# Altium PCB PCB1.PcbDoc
Units mil, origin at the board's own origin, x right, y up, seen from the top; angles counter-clockwise.
Board outline 6010.03 x 4010.03 mil, 2 copper layers (Top Layer, Bottom Layer); 63 components, 52 nets, 252 pads, 32 vias.
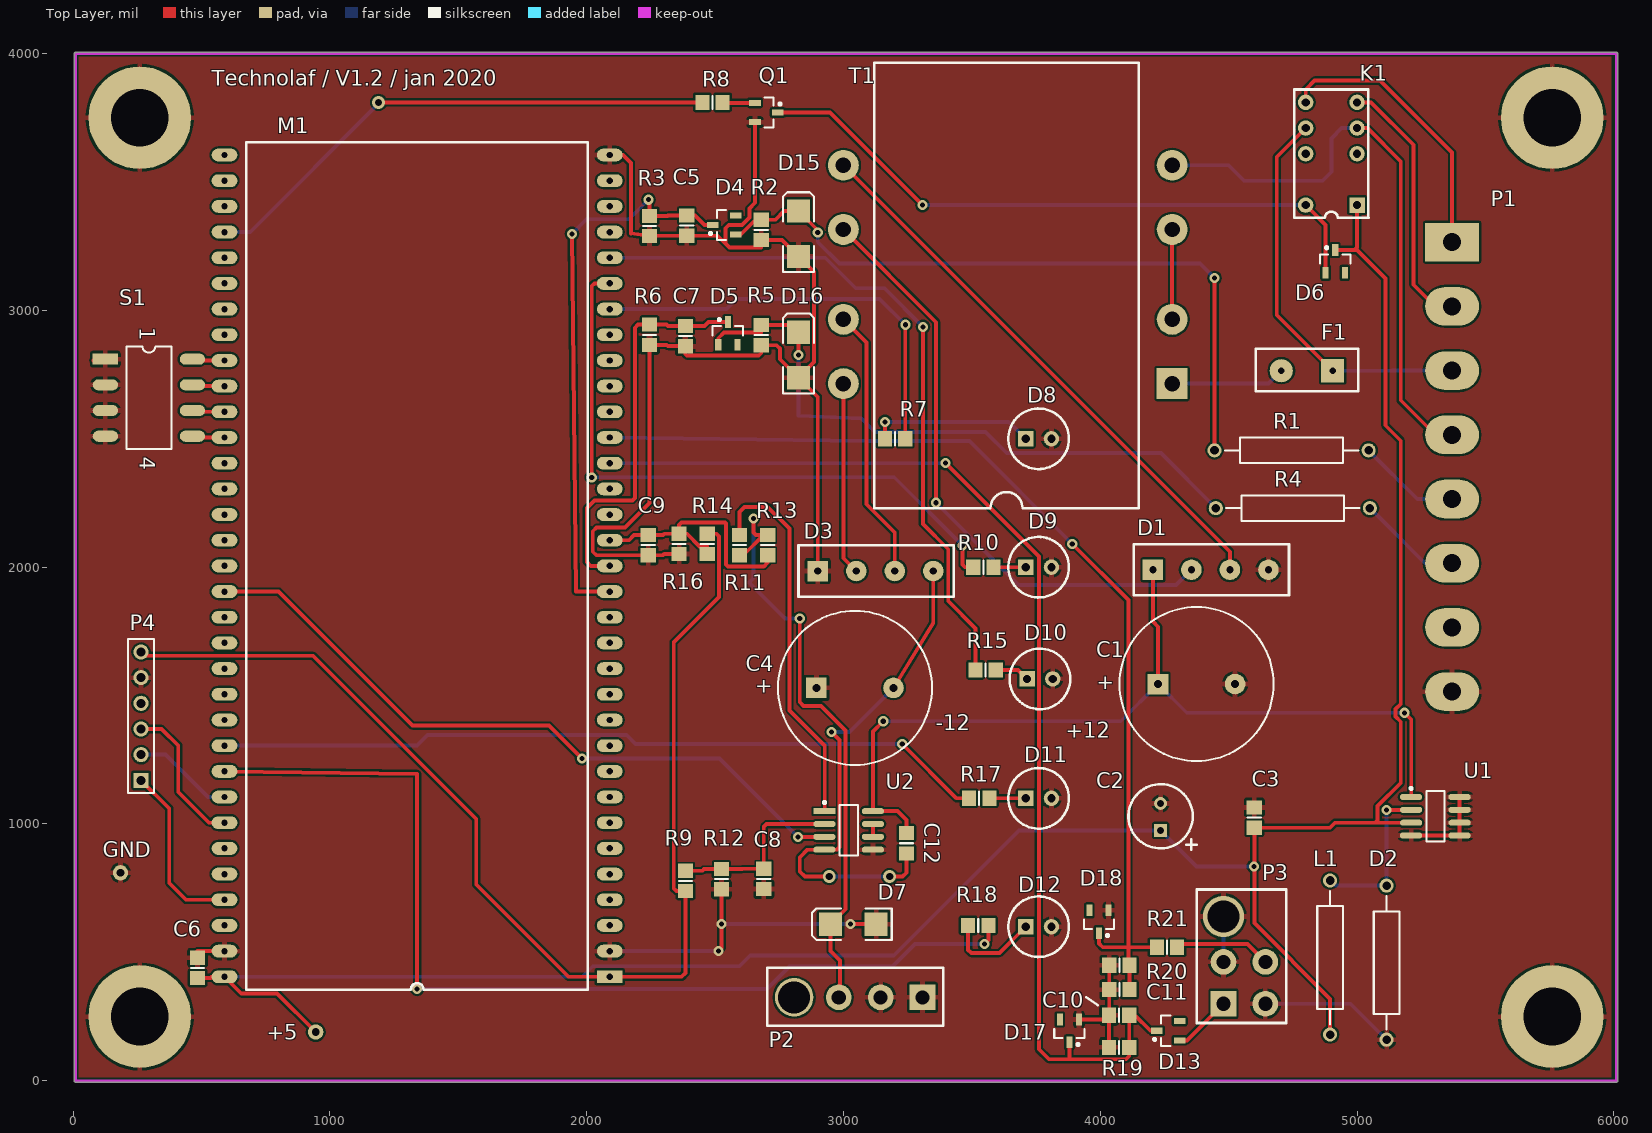
[diagram p0: Top Layer view]
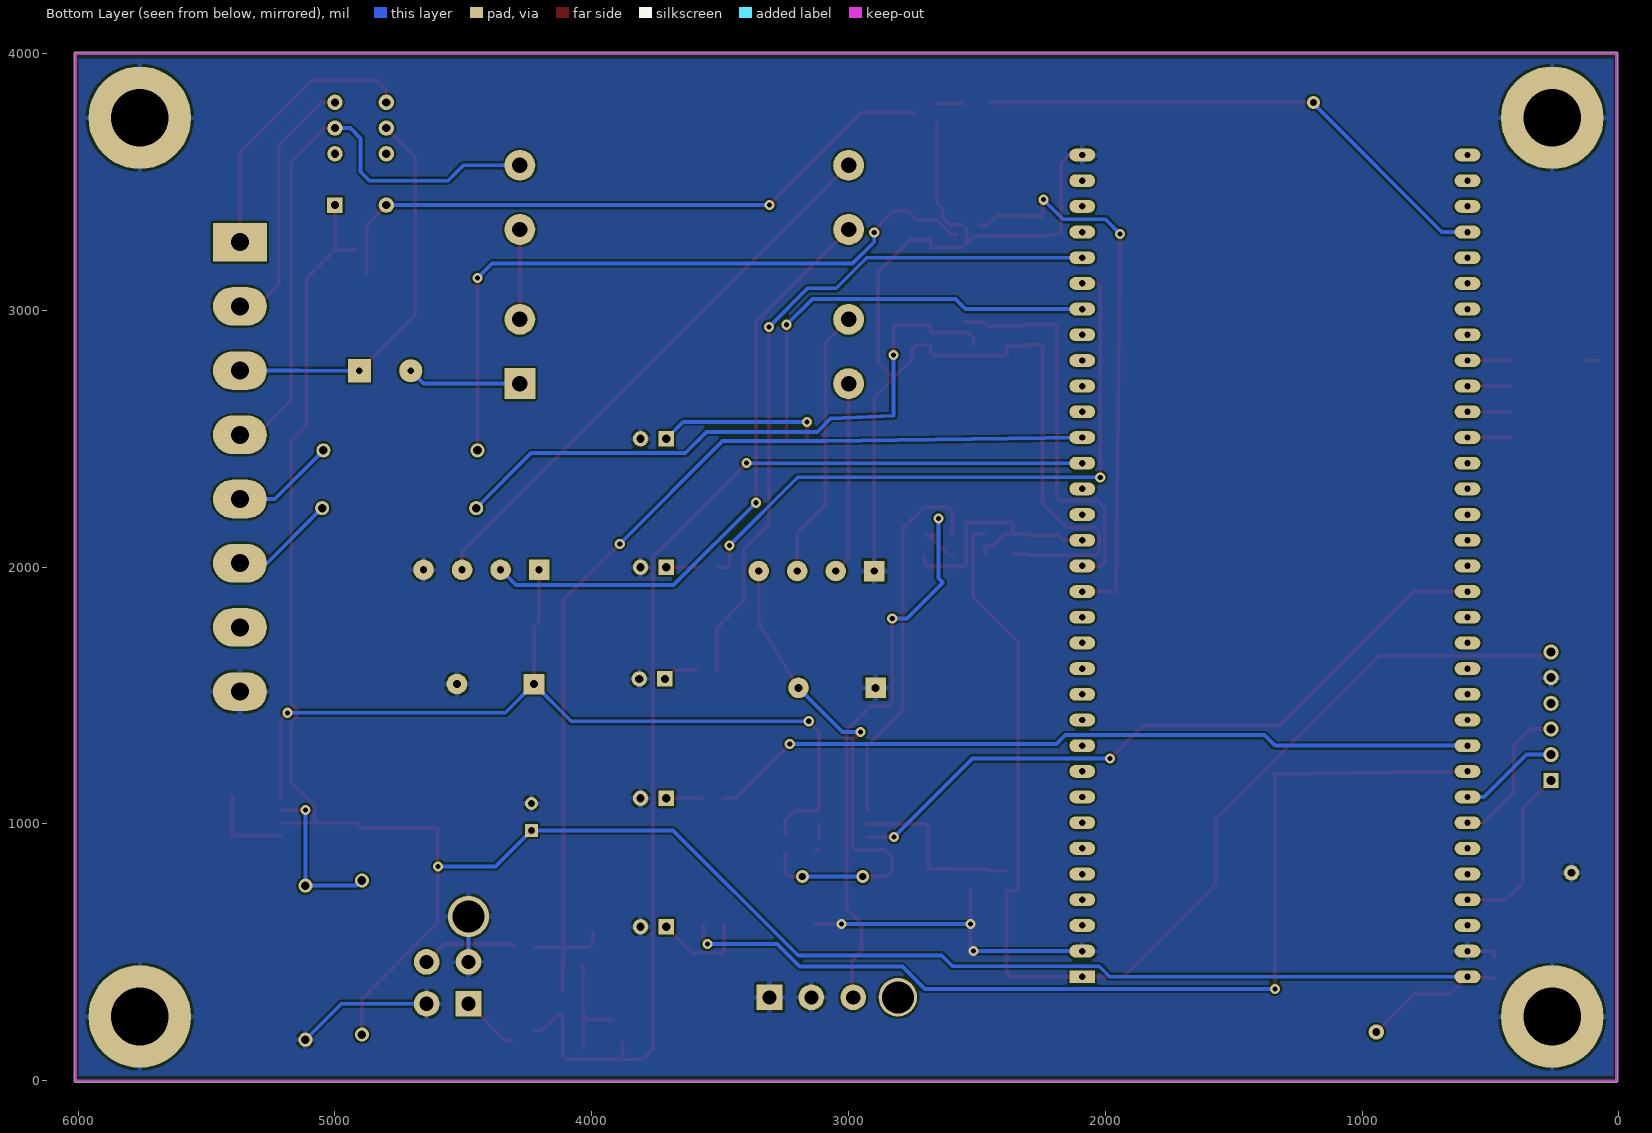
[diagram p1: Bottom Layer view, seen from below]

## Layer stack, top to bottom
Top Solder: solder mask 0.4, Solder Resist, Dk 3.5
Top Layer: signal copper 1.4
Dielectric 1: dielectric 12.6, FR-4, Dk 4.8
Bottom Layer: signal copper 1.4
Bottom Solder: solder mask 0.4, Solder Resist, Dk 3.5

## Board outline
4.98,0 4.98,4000 cw(c10,4000) 10,4005.02 6010,4005.02 cw(c6010,4000) 6015.02,4000 6015.02,0 cw(c6010,0) 6010,-5.01 10,-5.01 cw(c10,0)

## Design rules (kind name [scope] priority, off if disabled: settings)
BoardOutlineClearance [All] p1: gap=7.87 ignorepadtopadclearanceinfootprint=FALSE except(15.75: Arc-SplitBarrior Arc-SplitContinuation Track-SplitBarrior Track-SplitContinuation SMDPad-SplitBarrior SMDPad-SplitContinuation THPad-SplitBarrior THPad-SplitContinuation Via-SplitBarrior Via-SplitContinuation Fill-SplitBarrior Fill-SplitContinuation Poly-SplitBarrior Poly-SplitContinuation Region-SplitBarrior Region-SplitContinuation Text-SplitBarrior Text-SplitContinuation)
Clearance "Clearance HV" [InNetClass('hv')] p1: gap=30 ignorepadtopadclearanceinfootprint=TRUE
Clearance "Clearance Bottom Layer" [OnLayer('Bottom Layer')] p2: gap=8 ignorepadtopadclearanceinfootprint=TRUE except(10: Arc-Text Track-Text SMDPad-Text THPad-Text Via-Text Fill-Text Poly-Text Region-Text Text-Text)
Clearance "Clearance Top Layer" [OnLayer('Top Layer')] p3: gap=8 ignorepadtopadclearanceinfootprint=TRUE except(10: Arc-Text Track-Text SMDPad-Text THPad-Text Via-Text Fill-Text Poly-Text Region-Text Text-Text)
Clearance "Clearance Top Layer_1" [OnLayer('Top Layer')] p4: gap=8 ignorepadtopadclearanceinfootprint=TRUE except(10: Arc-Text Track-Text SMDPad-Text THPad-Text Via-Text Fill-Text Poly-Text Region-Text Text-Text)
HoleSize [All] p1: absolutevalues=TRUE maxlimit=248.03 minlimit=7.87 maxpercent=80.000 minpercent=20.000
MinimumAnnularRing [All] p1: minimumring=3
MinimumSolderMaskSliver [All] p1: minsoldermaskwidth=3.94
PolygonConnect PolygonConnect_1 [All] p1: thpad.connectstyle=Relief thpad.reliefconductorwidth=20 thpad.reliefentries=4 thpad.polygonreliefangle="90 Angle" thpad.airgapwidth=10 smdpad.connectstyle=Relief smdpad.reliefconductorwidth=20 smdpad.reliefentries=4 smdpad.polygonreliefangle="90 Angle" smdpad.airgapwidth=10 via.connectstyle=Direct via.reliefconductorwidth=20 via.reliefentries=4 via.polygonreliefangle="90 Angle" via.airgapwidth=10
RoomDefinition Top [InComponentClass('Top')] p1: confinementstyle=ConfineIn formatcopy=TRUE lockcomponents=FALSE outline 10,0 6000,0 6010,10 6010,4000 10,4000
RoutingCorners [All] p1: cornerstyle=Round minsetback=100 maxsetback=100
RoutingVias [All] p1: holewidth=19.68 width=39.37 viastyle="Through Hole" minholewidth=7.87 minwidth=17.72 maxholewidth=39.37 maxwidth=78.74
SilkToSilkClearance [All] p1: silktosilkclearance=3.94
SilkToSolderMaskClearance [IsPad] p1: minsilkscreentomaskgap=3.94 clearancetoexposedcopper=TRUE
SolderMaskExpansion [All] p1: expansion=4
Width [All] p1: maxlimit=100 minlimit=3.5 preferedwidth=15
25 further rules are at their usual default settings.

## Components (designator, comment, footprint, x,y, rotation, side; value= is the part's Value field where it differs from the comment)
C1 "Cap Pol1" RB7.6-15#1 4375,1545 r180 top value=2200u
C2 "Cap Pol1" RB0.1 4235,980 r90 top value=100uF
C3 "Cap" 6-0805_M 4600,1025 r270 top value=100n
C4 "2200u" RB7.6-15#2 3045,1530 r180 top
C5 "Cap" 6-0805_M 2390,3330 r90 top value=100n
C6 "Cap" 6-0805_M 485,440 r270 top value=100nF
C7 "Cap" 6-0805_M 2385,2900 r90 top value=100n
C8 "Cap" 6-0805_M 2690,786.22 r90 top value=100n
C9 "Cap" 6-0805_M 2240,2085.63 r90 top value=10nF
C10 "Cap" 6-0805_M 4073.78,255 r0 top value=100n
C11 "Cap" 6-0805_M 4074.37,355 r0 top value=100n
C12 "Cap" 6-0805_M 3245,925 r90 top value=100n
D1 "Bridge1" KBP06M 4205,1990 r90 top
D2 "BAT48" AXIAL-0.6 5115,460 r90 top
D3 "Bridge1" KBP06M 2900,1985 r90 top
D4 "MMBD914LT1G" SOT23_914 2535.71,3332.4 r180 top
D5 "MMBD914LT1G" SOT23_914 2550,2910.71 r90 top
D6 "MMBD914" SOT23_914 4915,3190.71 r90 top
D7 "SMBJ5.0CA" SMB 3038.58,610 r180 top
D8 "IN-S63AT5B" LED_T13/4 3760,2500 r90 top
D9 "" LED_T13/4 3760,2000 r90 top
D10 "" LED_T13/4 3765,1565 r90 top
D11 "" LED_T13/4 3760,1100 r90 top
D12 "" LED_T13/4 3760,600 r90 top
D13 "MMBD914" SOT23_914 4265,195 r180 top
D15 "SMBJ5.0CA" SMB 2825,3298.58 r90 top
D16 "SMBJ5.0CA" SMB 2825,2826.42 r90 top
D17 "MMBZ5V6ALT3G" SOT23_914 3880,194.29 r270 top
D18 "MMBZ5V6ALT3G" SOT23_914 3995,619.29 r270 top
F1 "MF-RM025/240" MF-RM025/240 4905,2765 r270 top
K1 "EC2-5NU" EC2-5NU 5000,3410 r180 top
L1 "B78108E1683J009" AXIAL-0.6 4895,480 r270 top value=68uH
M1 "STM32F0DISCOVERY" STM32F0DISCO 2090,405 r180 top
P1 "641828-1" 641828-1 5370,3265.51 r0 top
P2 "1-770873-0" MATENLOK_1X3 3308,325 r270 top
P3 "1-770874-1" MATENLOK_2X2 4480,300 r90 top
P4 "WIFI" HDR1X6 265,1170 r90 top
Q1 "DMN65D8L-7" SOT23_914 2700,3770.51 r0 top
R1 "RNV14FAL1M00" AXIAL-0.6 4745,2455 r0 top value=1M
R2 "Res1" 6-0805_M 2680,3313.78 r90 top value=10K
R3 "Res1" 6-0805_M 2245,3328.78 r90 top value=1M
R4 "RNV14FAL1M00" AXIAL-0.6 4750,2230 r0 top value=1M
R5 "Res1" 6-0805_M 2680,2903.78 r90 top value=10K
R6 "Res1" 6-0805_M 2245,2905 r90 top value=1M
R7 "Res1" 6-0805_M 3201.22,2500 r180 top value=68R
R8 "Res1" 6-0805_M 2490,3810 r180 top value=68R
R9 "Res1" 6-0805_M 2385,778.78 r270 top value=1K
R10 "Res1" 6-0805_M 3545,2000 r0 top value=68R
R11 "Res1" 6-0805_M 2595,2085.63 r90 top value=510R
R12 "Res1" 6-0805_M 2525,785 r90 top value=1K
R13 "Res1" 6-0805_M 2705,2085.63 r90 top value=200K
R14 "Res1" 6-0805_M 2470,2090.63 r90 top value=51K
R15 "Res1" 6-0805_M 3553.78,1600 r0 top value=68R
R16 "Res1" 6-0805_M 2360,2090.63 r90 top value=51K
R17 "Res1" 6-0805_M 3528.78,1100 r0 top value=68R
R18 "Res1" 6-0805_M 3525,605 r180 top value=68R
R19 "Res1" 6-0805_M 4073.78,130 r0 top value=300R
R20 "Res1" 6-0805_M 4074.37,450 r0 top value=100K
R21 "Res1" 6-0805_M 4260,520 r180 top value=300R
S1 "219-4MSTR" DIPSW4 126.02,2810 r0 top
T1 "FS16-400-C2" FS16-400-C2 4280,2715 r180 top
U1 "AP1509-50" SO8_N#1 5305,1030 r0 top
U2 "LF353" SO8_N#2 3020.51,975 r0 top

## Footprints (in the part's own frame and the unit in brackets; to place one, negate y for a bottom-side part, rotate by r counter-clockwise, add the part's x,y. Pads: shape width x height; smd on the part's side, far side on the other; paste and mask are expansions set on the pad)
6-0805_M [mm] "Chip Resistor, Body 2.0x1.2mm, IPC Low Density"
  rect 1.4x1.5 smd: 1(-1,0) 2(1,0)
  silkscreen extent 0,-0.65 0,0.65, body extent -1.07,-0.7 1.07,0.7, height 0.7
641828-1 [mil] "TE MATENLOK"
  rect 210x150 hole 70: 1(0,0)
  oval 210x150 hole 70: 2(0,-250) 3(0,-500) 4(0,-750) 5(0,-1000) 6(0,-1250) 7(0,-1500) 8(0,-1750)
AXIAL-0.6 [mm] "Axial Device, Thru-Hole; 2 Leads; 0.6 in Pin Spacing"
  round 1.4 hole 0.85: 1(-7.62,0) 2(7.62,0)
  silkscreen extent -6.6,-1.27 6.6,1.27
DIPSW4 [mm]
  rect 2.5x1.1 smd: 1(0,0)
  oval 2.5x1.1 smd: 2(0,-2.54) 3(0,-5.08) 4(0,-7.62) 5(8.61,-7.62) 6(8.61,-5.08) 7(8.61,-2.54) 8(8.61,0)
  silkscreen extent 2.08,-8.89 6.53,1.27
EC2-5NU [mil]
  rect 60x60 hole 32: 1(0,0)
  round 60 hole 32: 3(0,-200) 4(0,-300) 5(0,-400) 8(200,-400) 9(200,-300) 10(200,-200) 12(200,0)
  silkscreen extent -45,-450 245,50
FS16-400-C2 [mil]
  rect 120x120 hole 60: 1(0,0)
  round 120 hole 60: 2(0,-250) 3(0,-600) 4(0,-850) 5(1280,-850) 6(1280,-600) 7(1280,-250) 8(1280,0)
  silkscreen extent 130,-1250 1160,485
HDR1X6 [mm] "Connector; Header; 6 Position"
  rect 1.5x1.5 hole 0.9: 1(0,0)
  round 1.5 hole 0.9: 2(2.54,0) 3(5.08,0) 4(7.62,0) 5(10.16,0) 6(12.7,0)
  silkscreen extent -1.27,-1.27 13.97,1.27
KBP06M [mil]
  rect 80x80 hole 28: 1(0,0)
  round 80 hole 28: 2(0,-150) 3(0,-450) 4(0,-300)
  silkscreen extent -100,-530 100,75
LED_T13/4 [mil]
  rect 60x60 hole 32: 1(0,50)
  round 60 hole 32: 2(0,-50)
  silkscreen extent -118,-118 118,118
MATENLOK_1X3 [mil]
  rect 100x100 hole 55: 1(0,0)
  round 100 hole 55: 2(0,-163) 3(0,-326)
  round 150 hole 125: 4(0,-500)
  silkscreen extent -115,-605 110,82
MATENLOK_2X2 [mil]
  rect 100x100 hole 55: 1(0,0)
  round 100 hole 55: 2(0,-163) 3(163,-163) 4(163,0)
  round 160 hole 125: 2(340,0)
  silkscreen extent -75,-244 445,105
MF-RM025/240 [mil]
  rect 90x90 hole 26: 1(0,0)
  round 90 hole 26: 2(0,-200)
  silkscreen extent -85,-300 80,100
RB0.1 [mil]
  rect 50x50 hole 28: 1(-5,0)
  round 50 hole 28: 2(100,0)
  silkscreen extent -80,-140 175,125
RB7.6-15#1 [mil] "Polarized Capacitor (Radial); 2 Leads"
  rect 80x80 hole 32: 1(150,0)
  round 80 hole 32: 2(-150,0)
  silkscreen extent -300,-300 300,300
RB7.6-15#2 [mil] "Polarized Capacitor (Radial); 2 Leads"
  rect 80x80 hole 31: 1(150,0)
  round 80 hole 31: 2(-150,0)
  silkscreen extent -300,-300 300,300
SMB [mm] "DO-214-AA/SMB; 2 C-Bend Leads; Body 5.3 x 3.6 mm, inc. leads (LxW)"
  rect 2.3x2.3 smd: 1(-2.25,0) 2(2.25,0)
  silkscreen extent -3.8,-1.55 4.1,1.55
SO8_N#1 [mm] "SOIC, 8-Leads, Body 4.9x3.9mm, Pitch 1.27mm, IPC Medium Density"
  oval 2.2x0.6 smd: 1(-2.4,1.905) 2(-2.4,0.635) 3(-2.4,-0.635) 4(-2.4,-1.905) 5(2.4,-1.905) 6(2.4,-0.635) 7(2.4,0.635) 8(2.4,1.905)
  silkscreen extent -2.52,-2.5 0.9,2.88, body extent -2,-2.5 2,2.5, height 1.75
SO8_N#2 [mm] "SOIC, 8-Leads, Body 4.9x3.9mm, Pitch 1.27mm, IPC Medium Density"
  rect 2.2x0.6 smd: 1(-2.4,1.905)
  oval 2.2x0.6 smd: 2(-2.4,0.635) 3(-2.4,-0.635) 4(-2.4,-1.905) 5(2.4,-1.905) 6(2.4,-0.635) 7(2.4,0.635) 8(2.4,1.905)
  silkscreen extent -2.52,-2.5 0.9,2.88, body extent -2,-2.5 2,2.5, height 1.75
SOT23_914 [mm] "SOT23, 3-Leads, Body 2.9x1.3mm, Pitch 0.95mm, Lead Span 2.3mm - Reverse Pinning, IPC Medium Density"
  rect 1.15x0.6 smd: 1(-1.125,0.95) 2(1.125,0) 3(-1.125,-0.95)
  silkscreen extent -0.2,-1.5 1.47,1.5, body extent -0.7,-1.5 0.7,1.5, height 1.1
STM32F0DISCO [mil]
  rect 100x50 hole 25: 1(0,0)
  oval 100x50 hole 25: 2(0,-100) 3(0,-200) 4(0,-300) 5(0,-400) 6(0,-500) 7(0,-600) 8(0,-700) 9(0,-800) 10(0,-900) 11(0,-1000) 12(0,-1100) 13(0,-1200) 14(0,-1300) 15(0,-1400) 16(0,-1500) 17(0,-1600) 18(0,-1700) 19(0,-1800) 20(0,-1900) 21(0,-2000) 22(0,-2100) 23(0,-2200) 24(0,-2300) 25(0,-2400) 26(0,-2500) 27(0,-2600) 28(0,-2700) 29(0,-2800) 30(0,-2900) 31(0,-3000) 32(0,-3100) 33(0,-3200) 34(1500,-3200) 35(1500,-3100) 36(1500,-3000) 37(1500,-2900) 38(1500,-2800) 39(1500,-2700) 40(1500,-2600) 41(1500,-2500) 42(1500,-2400) 43(1500,-2300) 44(1500,-2200) 45(1500,-2100) 46(1500,-2000) 47(1500,-1900) 48(1500,-1800) 49(1500,-1700) 50(1500,-1600) 51(1500,-1500) 52(1500,-1400) 53(1500,-1300) 54(1500,-1200) 55(1500,-1100) 56(1500,-1000) 57(1500,-900) 58(1500,-800) 59(1500,-700) 60(1500,-600) 61(1500,-500) 62(1500,-400) 63(1500,-300) 64(1500,-200) 65(1500,-100) 66(1500,0)
  silkscreen extent 85,-3250 1415,50

## Part data
C1 C2: "Polarized Capacitor (Radial)", LatestRevisionDate=17-Jul-2002, LatestRevisionNote="Re-released for DXP Platform.", PackageDescription="Polarized Capacitor (Radial); 2 Leads", PackageReference=RB7.6-15, Published=8-Jun-2000, Publisher="Altium Limited"
C3 C5 C6 C7 C8 C9 C10 C11 C12: "Capacitor", LatestRevisionDate=17-Jul-2002, LatestRevisionNote="Re-released for DXP Platform.", PackageDescription="Radial Cap, Thru-Hole; 2 Leads; 0.3 in Pin Spacing", PackageReference=RAD-0.3, Published=8-Jun-2000, Publisher="Altium Limited"
C4: library part "Cap Pol1", "Polarized Capacitor (Radial)", LatestRevisionDate=17-Jul-2002, LatestRevisionNote="Re-released for DXP Platform.", PackageDescription="Polarized Capacitor (Radial); 2 Leads", PackageReference=RB7.6-15, Published=8-Jun-2000, Publisher="Altium Limited"
D1 D3: "Full Wave Diode Bridge", DatasheetVersion=E2732B, LatestRevisionDate=29-May-2009, LatestRevisionNote="Sch pins A & K swapped.", PackageDescription="Bridge Rectifier; 4 Terminals; Body 9.4 x 9.4 mm (typ); Pitch 5.08 mm", PackageReference=D-38, Published=8-Jun-2000, Publisher="Altium Limited"
D2: library part "D Schottky", "Schottky Diode", Code_JEDEC=DO-214-AA, LatestRevisionDate=17-Jul-2002, LatestRevisionNote="Re-released for DXP Platform.", PackageDescription="DO-214-AA/SMB; 2 C-Bend Leads; Body 5.3 x 3.6 mm, inc. leads (LxW)", PackageReference=SMB, Published=8-Jun-2000, Publisher="Altium Limited"
D4 D5 D6 D7 D13: library part Diode, "Default Diode", Code_JEDEC=DO-214-AB, LatestRevisionDate=17-Jul-2002, LatestRevisionNote="Re-released for DXP Platform.", PackageDescription="DO-214-AB/SMC; 2 C-Bend Leads; Body 7.9 x 5.9 mm, inc. leads (LxW)", PackageReference=SMC, PackageVersion=Sep-1996, Published=8-Jun-2000, Publisher="Altium Limited"
D8 D9 D10 D11 D12: library part LED0, "Typical INFRARED GaAs LED", LatestRevisionDate=08-Jul-2005, LatestRevisionNote="Mech Layer 1 removed.", PackageDescription="LED; 2 Leads", PackageReference=LED-0, Published=8-Jun-2000, Publisher="Altium Limited"
D15 D16 D17 D18: library part "D Zener", "Zener Diode", LatestRevisionDate=17-Jul-2002, LatestRevisionNote="Re-released for DXP Platform.", PackageDescription="Diode, Thru-Hole; 2 Leads; 0.7 in Pin Spacing", PackageReference=DIODE-0.7, Published=8-Jun-2000, Publisher="Altium Limited"
F1: library part "Fuse 2", "MF-RM025/240-2", LatestRevisionDate=17-Jul-2002, LatestRevisionNote="Re-released for DXP Platform.", PackageDescription="Thru-Hole; 2 Leads", PackageReference=PIN-W2/E2.8, Published=8-Jun-2000, Publisher="Altium Limited"
K1: library part Relay-DPDT, "Dual-Pole Dual-Throw Relay", LatestRevisionDate=17-Jul-2002, LatestRevisionNote="Re-released for DXP Platform.", PackageDescription="Relay; 8 Leads", PackageReference=DIP-P8, Published=24-Mar-1999, Publisher="Altium Limited"
L1: library part Inductor, "Inductor", Code_IEC=1005, Code_JEITA=0402, LatestRevisionDate=29-May-2009, LatestRevisionNote="IPC-7351 Footprint Added.", PackageDescription="Chip Inductor", PackageReference=0402-A, Published=8-Jun-2000, Publisher="Altium Limited"
P1: library part "Header 8", "Header, 8-Pin", LatestRevisionDate=17-Jul-2002, LatestRevisionNote="Re-released for DXP Platform.", Publisher="Altium Limited"
P2: library part "Header 3", "Header, 3-Pin", LatestRevisionDate=17-Jul-2002, LatestRevisionNote="Re-released for DXP Platform.", Publisher="Altium Limited"
P3: library part "Header 4", "Header, 4-Pin", LatestRevisionDate=17-Jul-2002, LatestRevisionNote="Re-released for DXP Platform.", Publisher="Altium Limited"
P4: library part "Header 6", "Header, 6-Pin", LatestRevisionDate=17-Jul-2002, LatestRevisionNote="Re-released for DXP Platform.", Publisher="Altium Limited"
Q1: library part MOSFET-N, "N-Channel MOSFET", LatestRevisionDate=17-Jul-2002, LatestRevisionNote="Re-released for DXP Platform.", PackageDescription="TO, Flat Index; 3 In-Line, Axial Leads; Body Dia. 4.6mm; Lead Dia. 0.5 mm (max)", PackageReference=E3, PackageVersion=1995/1996, Published=8-Jun-2000, Publisher="Altium Limited"
R1 R4: library part Res1, "Resistor", LatestRevisionDate=17-Jul-2002, LatestRevisionNote="Re-released for DXP Platform.", PackageDescription="Axial Device, Thru-Hole; 2 Leads; 0.3 in Pin Spacing", PackageReference=AXIAL-0.3, Published=8-Jun-2000, Publisher="Altium Limited"
R2 R3 R5 R6 R7 R8 R9 R10 R11 R12 R13 R14 R15 R16 R17 R18 R19 R20 R21: "Resistor", LatestRevisionDate=17-Jul-2002, LatestRevisionNote="Re-released for DXP Platform.", PackageDescription="Axial Device, Thru-Hole; 2 Leads; 0.3 in Pin Spacing", PackageReference=AXIAL-0.3, Published=8-Jun-2000, Publisher="Altium Limited"
S1: library part SW-DIP4, "DIP Switch", LatestRevisionDate=17-Jul-2002, LatestRevisionNote="Re-released for DXP Platform.", PackageReference=DIP-8, Published=24-Mar-1999, Publisher="Altium Limited"
T1: library part TRANSFO_2p2s
U1: library part AP1509
U2: library part LM358P, "IC OPAMP GP 700KHZ 8DIP", Current - Input Bias=20nA, Current - Output / Channel=30mA, Current - Supply=1mA, Manufacturer="Texas Instruments", Operating Temperature="0°C ~ 70°C", Package / Case="8-DIP (0.300\", 7.62mm)", Supplier Device Package=8-PDIP, Supplier Part Number 1=296-1395-5-ND, Voltage - Input Offset=3mV, Voltage - Supply, Single/Dual (±)="3 V ~ 32 V, ±1.5 V ~ 16 V", -3db Bandwidth=-, Amplifier Type="General Purpose", Category="Integrated Circuits (ICs)", ComponentLink1Description=http://www.ti.com/lit/ds/symlink/lm358.pdf, ComponentLink1URL=http://www.ti.com/lit/ds/symlink/lm358.pdf, Emplacement="OP AMP TUBE", Gain Bandwidth Product=700kHz, Manufacturer Part Number=LM358P, Mounting Type="Through Hole", Number of Circuits=2, Output Type=-, Packaging=Tube, Pricing 1="1=0.58, 10=0.45, 25=0.3788, 100=0.3085, 250=0.25568, 500=0.21156, 750=0.17631, 1000=0.15867 (CAD)", RoHS="RoHS Compliant", Slew Rate="0.3 V/µs", Stock 1=12094, Supplier 1=Digi-Key

## Free pads (board coordinates)
  round 400 hole 225: 1(260,250) 2(260,3750) 3(5760,3750) 4(5760,250)
  round 60 hole 30: 13(185,810) 14(945,190)

## Via types
v1: diameter 39.37, hole 19.68, Top Layer to Bottom Layer, 29 vias
v2: diameter 50, hole 28, Top Layer to Bottom Layer, 3 vias

## Nets (pads, with @x,y where several pads share a name; then routed paths per layer and width w, separated by ;. In a path a pad name is that pad's centre, name@x,y a point inside that pad or via, vN(x,y) a via of type N, cw(c..) or ccw(c..) an arc to the next point about the centre after c; other vN are vias at no path point)
3V3: M1.1 P4.6 R9.2 R14.2 | length 4662.8
  Top Layer w15: P4.6 280,1655 935,1655 1570,1020 1570,765 1930,405 M1.1 2370,405 2385,420 R9.2 2349.59,739.41 2339,750 2339,1707 2516,1884 2516,2120 2506,2130 R14.2
+5V: C2.1 C3.2 C6.2 D6.2 K1.1 L1.2 M1.66 pad.14 U1.3 | length 9025.3
  Top Layer w15: C6.2 535,400.63 539.37,405 M1.66 655,340 795,340 pad.14 ; v1(4598,835) v1@4600,837 ; L1.2 4895,319 4600,614 v1@4600,837 ; D6.2 4990,3235 ; K1.1 5000,3245 4990,3235 ; U1.3 5070,1005 ; v1@4600,837 C3.2 4895,985.63 4914.37,1005 5070,1005 ; 4990,3235 5000,3235 5110.49,3124.51 5110.49,2553 5110,2552.51 5170,2492.51 5170,1467.76 5149.81,1447.57 5149.81,1418.43 5170,1398.24 5170,1159.76 5079.81,1069.57 5079.81,1014.81 5070,1005
  Bottom Layer w15: M1.66 1983,405 2024,446 2595,446 2637,488 3196,488 3683,975 C2.1 4375,835 v1(4598,835)
+12V: C1.1 C12.2 D1.1 U1.1 U2.8 | length 3490.7
  Top Layer w15: v1(3155,1400) 3115,1360 U2.8 3210,1050 3245,1015 C12.2 ; D1.1 4205,1788 4225,1768 C1.1 ; v1(5185,1433) 5211,1407 5211,1105 U1.1
  Bottom Layer w15: v1(3155,1400) 4080,1400 C1.1 4337,1433 v1(5185,1433)
-12V: C4.2 C12.1 D3.3 U2.4 | length 2023.5
  Top Layer w15: v2(2945,795) 2850,795 2830,815 2830,870 2860,900 U2.4 2975,900 2985,910 2985,1327.01 v1(2954.01,1358) ; v2(3180,795) 3230,795 3245,810 C12.1 ; C4.2 3350,1783 D3.3 D3.3@3350,2005
  Bottom Layer w15: v2(2945,795) v2(3180,795) ; v1(2954.01,1358) 3023,1358 C4.2
CONTACTOR: M1.37 R8.2 | length 2067.7
  Top Layer w15: v2(1190,3810) R8.2
  Bottom Layer w15: M1.37 690,3305 v2@1190,3805
EV_L1: P1.5 R1.2 | length 403.5
  Bottom Layer w15: R1.2 5234.49,2265.51 P1.5
EV_L2: P1.6 R4.2 | length 408.8
  Bottom Layer w15: R4.2 5264.49,2015.51 P1.6
GFI: C11.2 D18.2 M1.22 R20.2 R21.2 | length 4073.1
  Top Layer w15: v1(3891,2091) 4109.37,1872.63 4109.37,520 ; D18.2 3995,535 4010,520 4109.37,520 ; R20.2@4109.37,450.63 R20.2@4113.74,446.26 ; C11.2 R20.2@4113.74,446.26 ; R21.2 4109.37,520 ; 4109.37,520 4109.37,460 4113.74,455.63 R20.2@4113.74,446.26
  Bottom Layer w15: M1.22 3091,2491 3491,2491 v1(3891,2091)
GND: C1.2 C2.2 C3.1 C4.1 C5.1 C6.1 C7.1 C8.1 C9.1 C10.1 C11.1 D1.3 D2.1 D3.1 D7.1 D8.2 D9.2 D10.2 D11.2 D12.2 D15.1 D16.1 D17.1 D18.1 M1.2 M1.33 M1.65 P1.8 P2.1 P2.2 P3.2 P3.4 P4.5 pad.1 pad.2 pad.3 pad.4 pad.13 Q1.3 R2.1 R3.1 R5.1 R6.1 R12.1 R16.1 R19.1 R20.1 S1.1 S1.2 S1.3 S1.4 U1.4 U1.5 U1.6 U1.7 U1.8 U2.5 | length 8106.7
  Top Layer w15: S1.1@80,2805 S1.1@125,2805 ; pad.1 pad.1@260,355 ; C6.1 485,505 M1.65 ; M1.33 2141,3605 2172.18,3573.82 2172.18,3300 R3.1 2245,3290.63 C5.1 2510.37,3290.63 2541,3260 ; R16.1 2302,2051.26 2297,2046.26 C9.1 2037.74,2046.26 2024,2060 2024,2140 2039,2155 2150,2155 2245,2250 R6.1 2312,2865.63 2317,2860.63 C7.1 2385,2829 2390,2824 2670,2824 2680,2834 R5.1 2740,2864.41 2753,2851.41 2753,2809.83 D16.1 ; v1(2514,505) 2525,516 v1(2525,610) R12.1 ; Q1.3 2656,3733.11 2656,3419 2634,3397 2634,3361.53 2604.74,3332.27 2553.27,3332.27 2541,3320 2541,3260 ; D3.1 2900,2662.83 D16.1 ; v1(3028,610) D7.1 ; U2.5 U2.5@3127.17,900 ; P2.2 P2.2@3150,325 ; D12.2 D12.2@3830,600 ; D17.1 4017.99,238.58 C10.1 ; R20.1@4030.63,437.22 R20.1@4031.85,436 ; R19.1 C10.1 ; R20.1 C11.1 4035,255.59 C10.1 ; U1.4 U1.5 U1.6 U1.7 U1.8 ; 2541,3260 2556.5,3244.5 2680,3244.5 R2.1 2760.59,3274.41 D15.1 2886,3149 2886,2798.83 D16.1
  Bottom Layer w15: M1.2 v1(2514,505) ; v1(2525,610) v1(3028,610) ; P2.2 P2.2@3145,360.51 ; P3.4 P3.2@4480,640 ; P3.2@4643,300 4975,300 D2.1
HV1: C5.2 D4.2 M1.16 R3.2 | length 2204.9
  Top Layer w15: v1(1943,3298) 1958,1905 M1.16 ; v1(2241,3431) 2245,3427 R3.2 2316,3368.15 2317.22,3369.37 C5.2 2422,3369.37 2458.97,3332.4 D4.2
  Bottom Layer w15: v1(1943,3298) 2000,3355 2165,3355 v1(2241,3431)
HV2: C7.2 D5.2 M1.17 R6.2 | length 1546.7
  Top Layer w15: M1.17 2016,2005 2001,2020 2001,2230 2031,2260 2178,2260 2188,2270 2188,2932.37 2200,2944.37 R6.2 2312,2944.37 2317,2939.37 C7.2 2459,2939.37 2474.63,2955 D5.2
IMEAS: C10.2 D13.2 D17.2 M1.21 R19.2 | length 4469.8
  Top Layer w15: v1(3397,2405) 3761,2041 3761,123 3800,84 3880,84 ; D17.2 3880,84 ; D13.2 4196,195 4136,255 C10.2 R19.2 4113.15,97.15 4100,84 3880,84
  Bottom Layer w15: M1.21 v1(3397,2405)
MAINS_L1: F1.1 K1.9 P1.3 | length 1546.9
  Top Layer w15: K1.9 4687.5,3597.5 4687.5,2982.5 F1.1
  Bottom Layer w15: F1.1 5137,2765 5137.51,2765.51 P1.3
MAINS_L2: K1.4 P1.4 T1.4 | length 2315.5
  Top Layer w15: K1.4 5040,3710 5170,3580 5170,2650 5304.49,2515.51 P1.4
  Bottom Layer w15: T1.4 4500,3565 4560,3505 4865,3505 4900,3540 4900,3670 4940,3710 K1.4
NetC8_2: C8.2 R9.1 R12.2 U2.2 | length 712.7
  Top Layer w15: R9.1 2451,818.15 2457.22,824.37 R12.2 2606,824.37 2607.22,825.59 C8.2 2690,990 2700,1000 U2.2
NetD1_2: D1.2 T1.6 | length 2365.3
  Top Layer w15: T1.6 3361,2954 v1(3361,2251)
  Bottom Layer w15: v1(3361,2251) 3682,1930 4295,1930 D1.2
NetD1_4: D1.4 T1.5 | length 2198.4
  Top Layer w15: T1.5 4505,2060 D1.4
NetD2_2: D2.2 L1.1 U1.2 | length 618.8
  Top Layer w15: v1(5115,1055) U1.2
  Bottom Layer w15: L1.1 4915,760 D2.2 v1(5115,1055)
NetD3_2: D3.2 T1.8 | length 750.7
  Top Layer w15: T1.8 3000,2035 D3.2
NetD3_4: D3.4 T1.7 | length 1062.8
  Top Layer w15: T1.7 3090,2875 3090,2245 3200,2135 D3.4
NetD4_1: D4.1 D15.2 R1.1 R2.2 | length 2708.8
  Top Layer w15: D4.1 2600,3295 2658.15,3353.15 R2.2 2735,3353.15 2769.02,3387.17 D15.2 2900,3312.17 v1(2900,3303.58) ; R1.1 v1(4445,3126)
  Bottom Layer w15: v1(2900,3303.58) 2900,3267 2984,3183 4388,3183 v1(4445,3126)
NetD5_1: D5.1 D16.2 R4.1 R5.2 | length 2499
  Top Layer w15: D5.1 2512.6,2891.6 2535,2914 2680,2914 R5.2 2825,2943.15 D16.2 v1(2825,2827)
  Bottom Layer w15: v1(2825,2827) 2825,2590 3070,2579 3122,2527 3553,2527 3636,2444 4236,2444 R4.1
NetD6_1: D6.1 K1.12 Q1.2 | length 2500.8
  Top Layer w15: Q1.2 2947.49,3770.51 v1(3308,3410) ; K1.12 4877.6,3332.4 D6.1
  Bottom Layer w15: v1(3308,3410) K1.12
NetD7_2: D7.2 P2.3 R11.1 R13.2 | length 2379.9
  Top Layer w15: R11.1 2610,2046.26 R13.2@2688.74,2125 ; v1(2650,2190) 2650,2135 2660,2125 R13.2@2688.74,2125 ; R13.2 R13.2@2688.74,2125 ; v1(2830,1800) 2830,1475 2845,1460 2912,1460 3008,1364 3008,668 D7.2 2950,506 2987,469 P2.3@2987,325
  Bottom Layer w15: v1(2650,2190) 2650,1957 2633,1940 2773,1800 v1(2830,1800)
NetD8_1: D8.1 R7.2 | length 641.5
  Top Layer w15: R7.2 v1(3161.85,2566)
  Bottom Layer w15: v1(3161.85,2566) 3644,2566 D8.1
NetD9_1: D9.1 R10.2 | length 125.6
  Top Layer w15: R10.2 D9.1
NetD10_1: D10.1 R15.2 | length 136.3
  Top Layer w15: R15.2 3680,1600 D10.1
NetD11_1: D11.1 R17.2 | length 141.9
  Top Layer w15: R17.2 D11.1
NetD12_1: D12.1 R18.2 | length 367.3
  Top Layer w15: R18.2 3485.63,510 3498.49,497.14 3607.14,497.14 D12.1
NetD13_1: D13.1 P3.1 | length 229.7
  Top Layer w15: D13.1 4337.6,157.6 P3.1
NetF1_2: F1.2 T1.1 | length 445.7
  Bottom Layer w15: T1.1 4655,2715 F1.2
NetM1_27: M1.27 R7.1 | length 1652.7
  Top Layer w15: R7.1 3240.59,2943.59 v1(3241,2944)
  Bottom Layer w15: M1.27 2545,3005 2584,3044 3141,3044 v1(3241,2944)
NetM1_28: M1.28 R10.1 | length 2493.1
  Top Layer w15: v1(2020,2350) 2020,3095 2030,3105 M1.28 ; v1(3464,2084) 3464,2010 3474,2000 R10.1
  Bottom Layer w15: v1(2020,2350) 3198,2350 v1(3464,2084)
NetM1_29: M1.29 R15.1 | length 2752.1
  Top Layer w15: v1(3310,2936) 3310,2168 3408,2070 3408,1868 3514.41,1761.59 R15.1
  Bottom Layer w15: M1.29 2929,3205 3048,3086 3160,3086 v1(3310,2936)
NetM1_42: M1.42 S1.8 | length 165
  Top Layer w15: S1.8@425,2805 M1.42
NetM1_43: M1.43 S1.7 | length 165
  Top Layer w15: S1.7@425,2705 M1.43
NetM1_44: M1.44 S1.6 | length 165
  Top Layer w15: S1.6@425,2605 M1.44
NetM1_45: M1.45 S1.5 | length 165
  Top Layer w15: S1.5@425,2505 M1.45
NetM1_57: M1.57 R17.1 | length 3018.3
  Top Layer w15: v1(3229,1312) 3441,1100 R17.1
  Bottom Layer w15: M1.57 1340,1305 1381,1346 2156,1346 2190,1312 v1(3229,1312)
NetM1_58: M1.58 R18.1 | length 3947.5
  Top Layer w15: M1.58 1340,1195 v1(1340,358) ; v1(3550,533) 3564.37,547.37 R18.1
  Bottom Layer w15: v1(1340,358) 2703,358 2790,445 3191,445 3279,533 v1(3550,533)
NetP3_3: P3.3 R21.1 | length 378
  Top Layer w15: R21.1 4312.37,533 4573,533 P3.3
NetQ1_1: Q1.1 R8.1 | length 107.5
  Top Layer w15: R8.1@2549.37,3805 2552.28,3807.91 Q1.1
NetR11_2: R11.2 U2.1 | length 1486.2
  Top Layer w15: R11.2 2595,2215 2615,2235 2705,2235 2790,2150 2790,1442.63 2927,1305.63 2927,1050 U2.1
NetT1_2: T1.2 T1.3 | length 350
  Top Layer w15: T1.2 T1.3
NetU2_6: U2.6 U2.7 | length 50
  Top Layer w15: U2.6 U2.7
PILOT_ADC: C9.2 M1.18 R13.1 R14.1 R16.2 | length 1023.1
  Top Layer w15: M1.18 2165,2105 2185,2125 C9.2 2297,2125 2302,2130 R16.2 ; R14.1 2470,2081 2439.5,2081 2390.5,2130 R16.2 ; R13.1 2705,2018 2690,2003 2550,2003 2543,2010 2543,2171 2540,2174 2370,2174 2360,2164 R16.2
PILOT_PWM: M1.51 U2.3 | length 2731.6
  Top Layer w15: M1.51 800,1905 1322,1383 1854,1383 v1(1982,1255) ; v1(2823,950) U2.3
  Bottom Layer w15: v1(1982,1255) 2518,1255 v1(2823,950)
RLY_COIL_1: K1.8 P1.1 | length 1100
  Top Layer w15: K1.8 4800,3860 4835,3895 5090,3895 5370,3615 P1.1
RLY_COIL_2: K1.5 P1.2 | length 1018.3
  Top Layer w15: K1.5 5055,3810 5220,3645 5220,3100 5304.49,3015.51 P1.2
WIFI_RST: M1.63 P4.1 | length 687.5
  Top Layer w15: P4.1 375,1060 375,770 440,705 M1.63
WIFI_RX: M1.60 P4.3 | length 581.6
  Top Layer w15: P4.3 345,1370 410,1305 410,1125 530,1005 M1.60
WIFI_TX: M1.59 P4.2 | length 393.3
  Bottom Layer w15: P4.2 360,1270 525,1105 M1.59
pads on no net: D4.3 D5.3 D6.3 D13.3 D17.3 D18.3 K1.3 K1.10 M1.3 M1.4 M1.5 M1.6 M1.7 M1.8 M1.9 M1.10 M1.11 M1.12 M1.13 M1.14 M1.15 M1.19 M1.20 M1.23 M1.24 M1.25 M1.26 M1.30 M1.31 M1.32 M1.34 M1.35 M1.36 M1.38 M1.39 M1.40 M1.41 M1.46 M1.47 M1.48 M1.49 M1.50 M1.52 M1.53 M1.54 M1.55 M1.56 M1.61 M1.62 M1.64 P1.7 P2.4 P4.4

## Polygon pours and split planes (outlines as drawn)
GND on Top Layer "GND_L01_P005" (solid, pour order 5): -5,0 5990,0 5990,4000 -5,4000
GND on Bottom Layer "GND_L02_P002" (solid, pour order 2): -5.08,3980 5730,3980 6000,3980 6000,20 4.95,20

## Keep-outs
Keep-Out Layer:
  lines w10: 10,0 6010,0 6010,4000 10,4000 10,0

## Silkscreen, mask and mechanical layers (free items; w line width, h text height)
Top Overlay:
  lines w10: 3945,325 3990,295
  text "Technolaf / V1.2 / jan 2020" at 540,3875 h60
  text "1" at 260,2935 h60 r270
  text "4" at 260,2430 h60 r270
  text "-12" at 3360,1365 h60
  text "+12" at 3865,1335 h60
  text "GND" at 115,870 h60
  text "+5" at 755,160 h60

## Text inside footprints (layer, text, board x,y; h text height)
C1: Top Overlay "+" at 4054.85,1574.01 h59.06 r180
C4: Top Overlay "+" at 2724.85,1559.01 h59.06 r180